# Altium PCB AFE.PcbDoc (part 2 of 2)
Units mm, origin at the board's own origin, x right, y up, seen from the top; angles counter-clockwise.
Board outline 80 x 100 mm, 4 copper layers (Top Copper, Signal Layer 1, Signal Layer 2, Bottom Copper), stack 1.57 mm thick; 79 components, 51 nets, 246 pads, 287 vias.
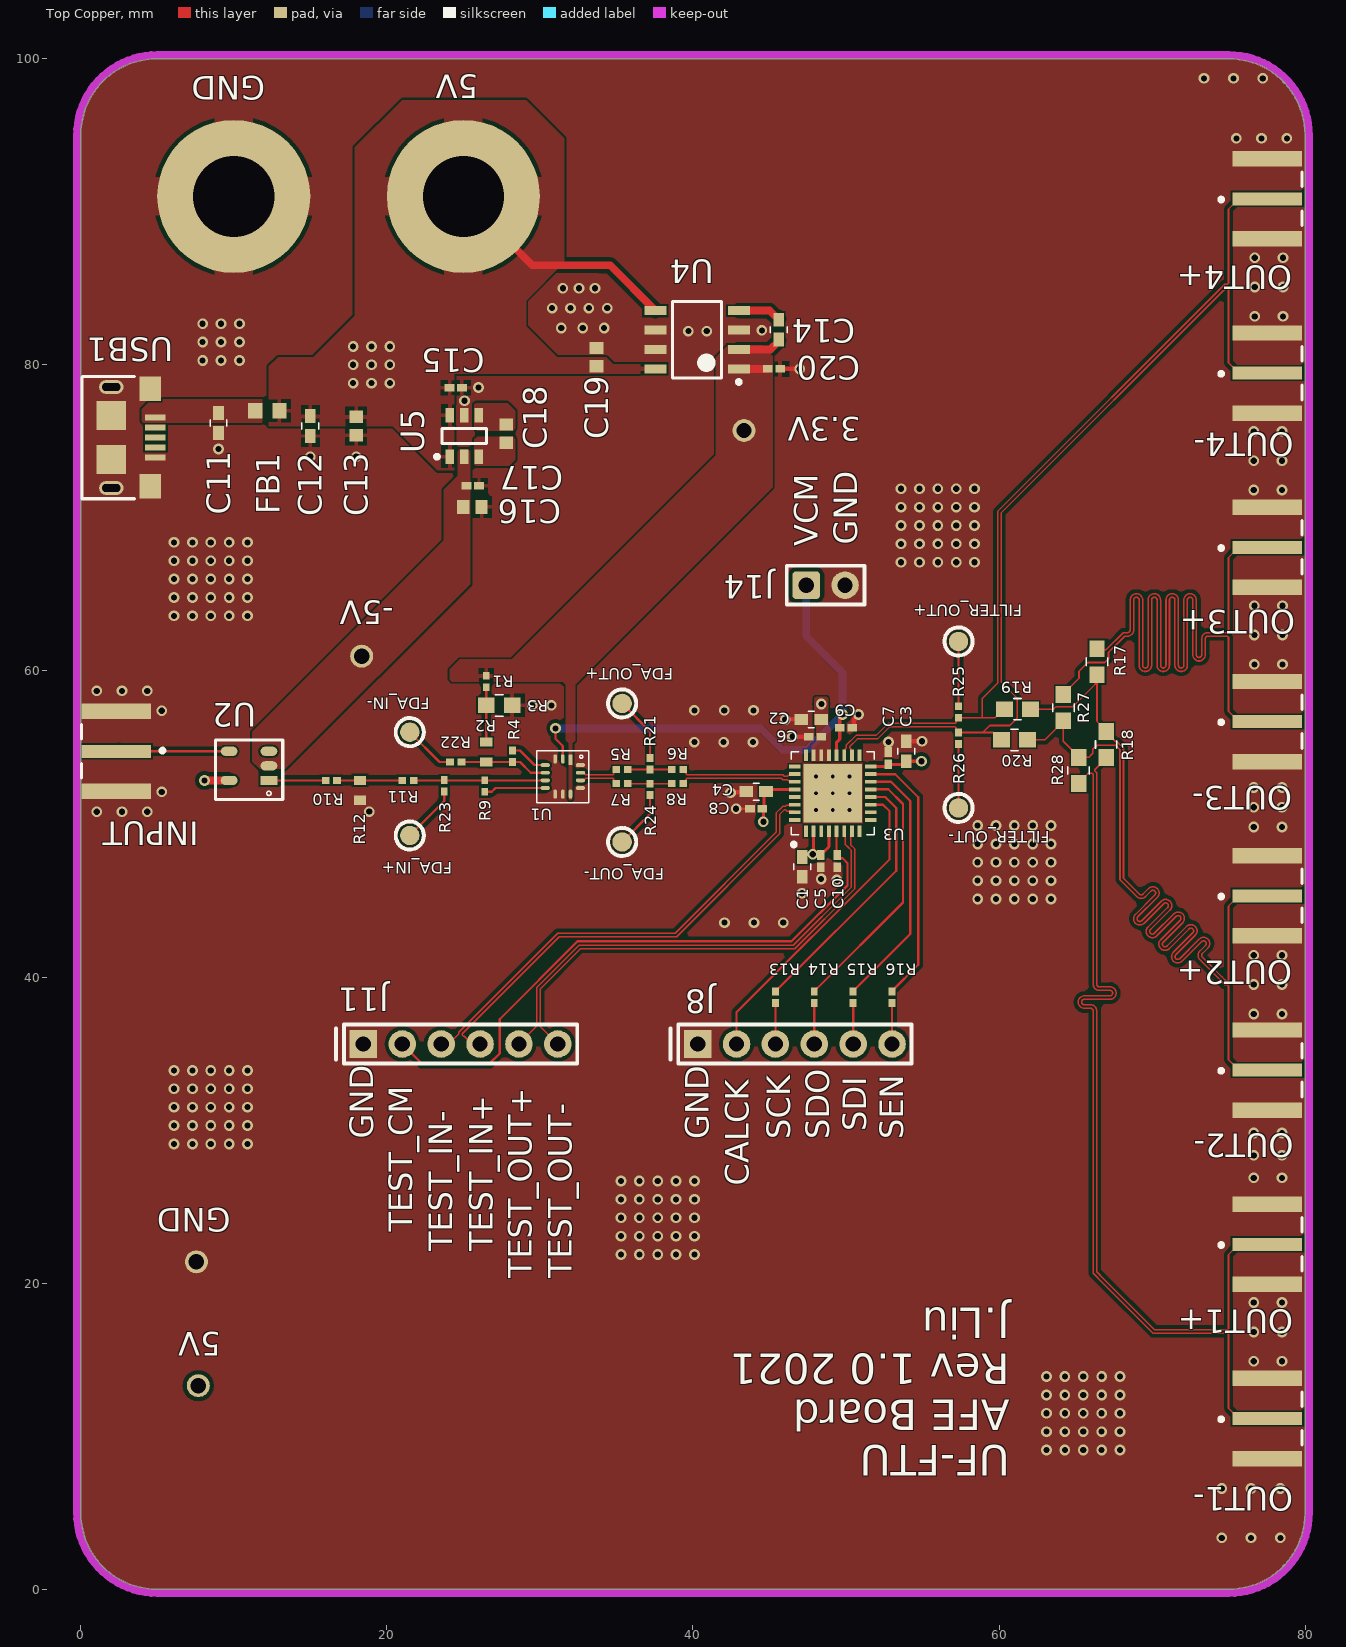
[diagram p0: Top Copper view]

## Keep-outs (continued)
Keep-Out Layer: (continued)
  lines w0.5: -0.25,5 ccw(c5,5) 5,-0.25 ; -0.25,5 -0.25,95 ; -0.25,5 -0.25,5 ; -0.25,95 cw(c5,95) 4.999,100.25 ; -0.25,95 -0.25,95 ; 4.999,100.25 cw(c5,100) 5,100.25 ; 4.999,100.25 cw(c5,95) 5,100.25 ; 5,-0.25 75,-0.25 ccw(c75,5) 80.25,4.999 ; 5,-0.25 5,-0.25 ; 5,100.25 75,100.25 ; 75,100.25 cw(c75,95) 75.003,100.25 ; 75,100.25 cw(c75,100) 75.003,100.25 ; 75.003,100.25 cw(c75,95) 80.25,95.001 ; 80.25,4.999 ccw(c80,5) 80.25,5 ; 80.25,4.999 ccw(c75,5) 80.25,5 ; 80.25,5 80.25,95 ; 80.25,95 ccw(c75,95) 80.25,95.001 ; 80.25,95 ccw(c80,95) 80.25,95.001 ; 80.25,95 ccw(c80,95) 80.25,95

## Silkscreen, mask and mechanical layers (free items; w line width, h text height)
Top Overlay:
  text "GND" at 50.746,68.254 h1.52 r90
  text "VCM" at 48.146,68.154 h1.52 r90
  text "SDI" at 51.319,29.935 h1.52 r90
  text "GND" at 19.103,29.452 h1.52 r90
  text "GND" at 41.02,29.415 h1.52 r90
  text "SCK" at 46.353,29.415 h1.52 r90
  text "SDO" at 48.905,29.415 h1.52 r90
  text "SEN" at 53.745,29.415 h1.52 r90
  text "CALCK" at 43.637,26.368 h1.52 r90
  text "TEST_CM" at 21.647,23.358 h1.52 r90
  text "TEST_IN-" at 24.287,22.089 h1.52 r90
  text "TEST_IN+" at 26.934,22.089 h1.52 r90
  text "TEST_OUT+" at 29.46,20.311 h1.52 r90
  text "TEST_OUT-" at 32.082,20.311 h1.52 r90
  text "UF-FTU / AFE Board / Rev 1.0 2021 / J.Liu" at 60.7,18.4 h2 r180
Bottom Overlay:
  text "JLCJLCJLCJLC" at 53.8,95.1 h0.9 r180